# EAGLE board my_tic_tac_toe_board2 (EAGLE 6.5.0)
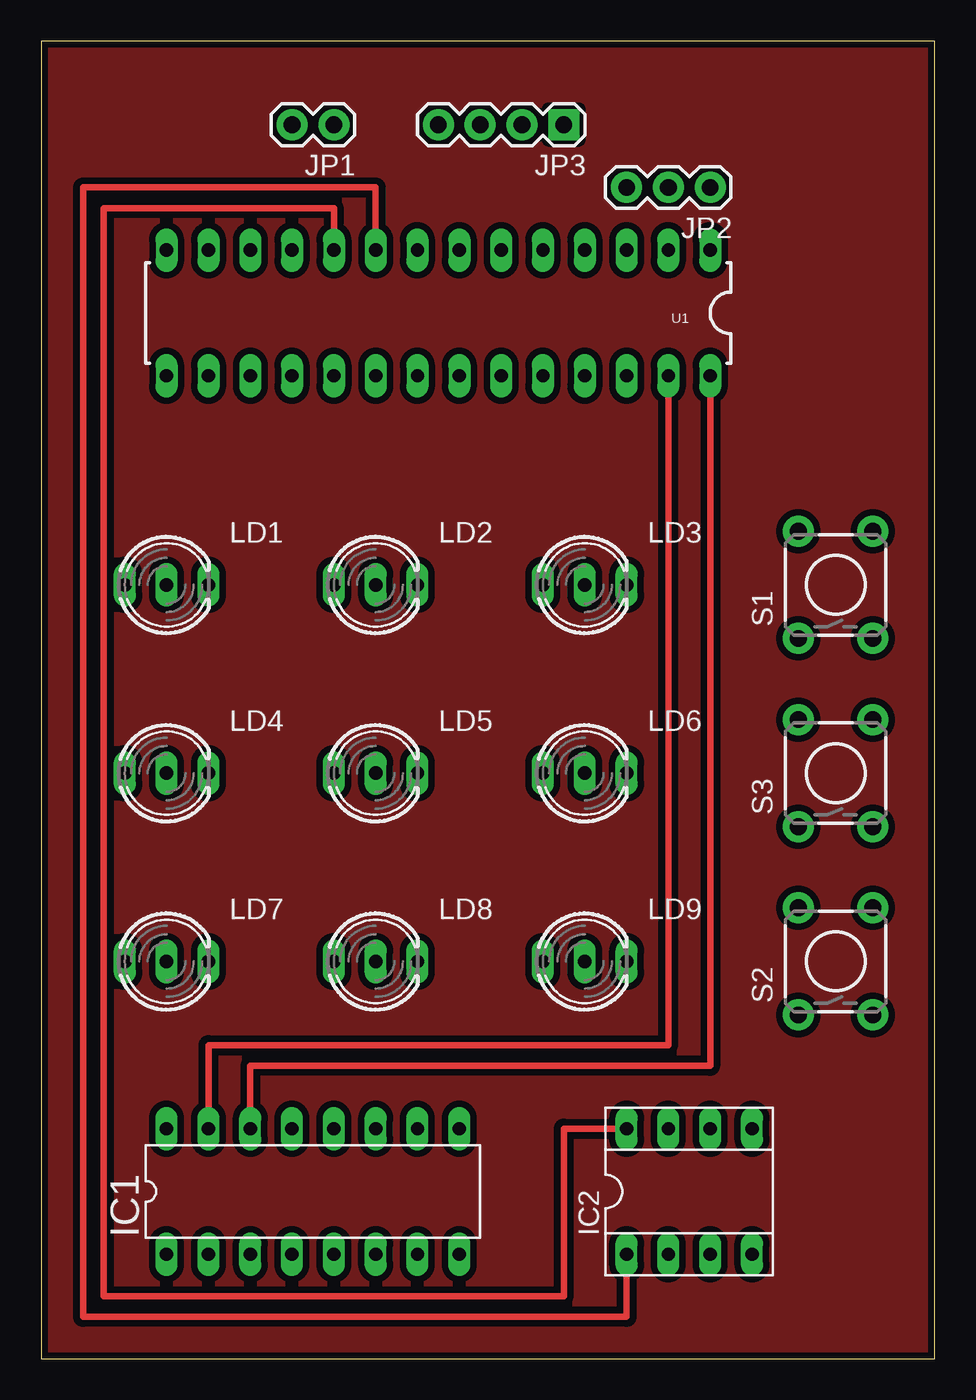
[diagram p0: board, top side]
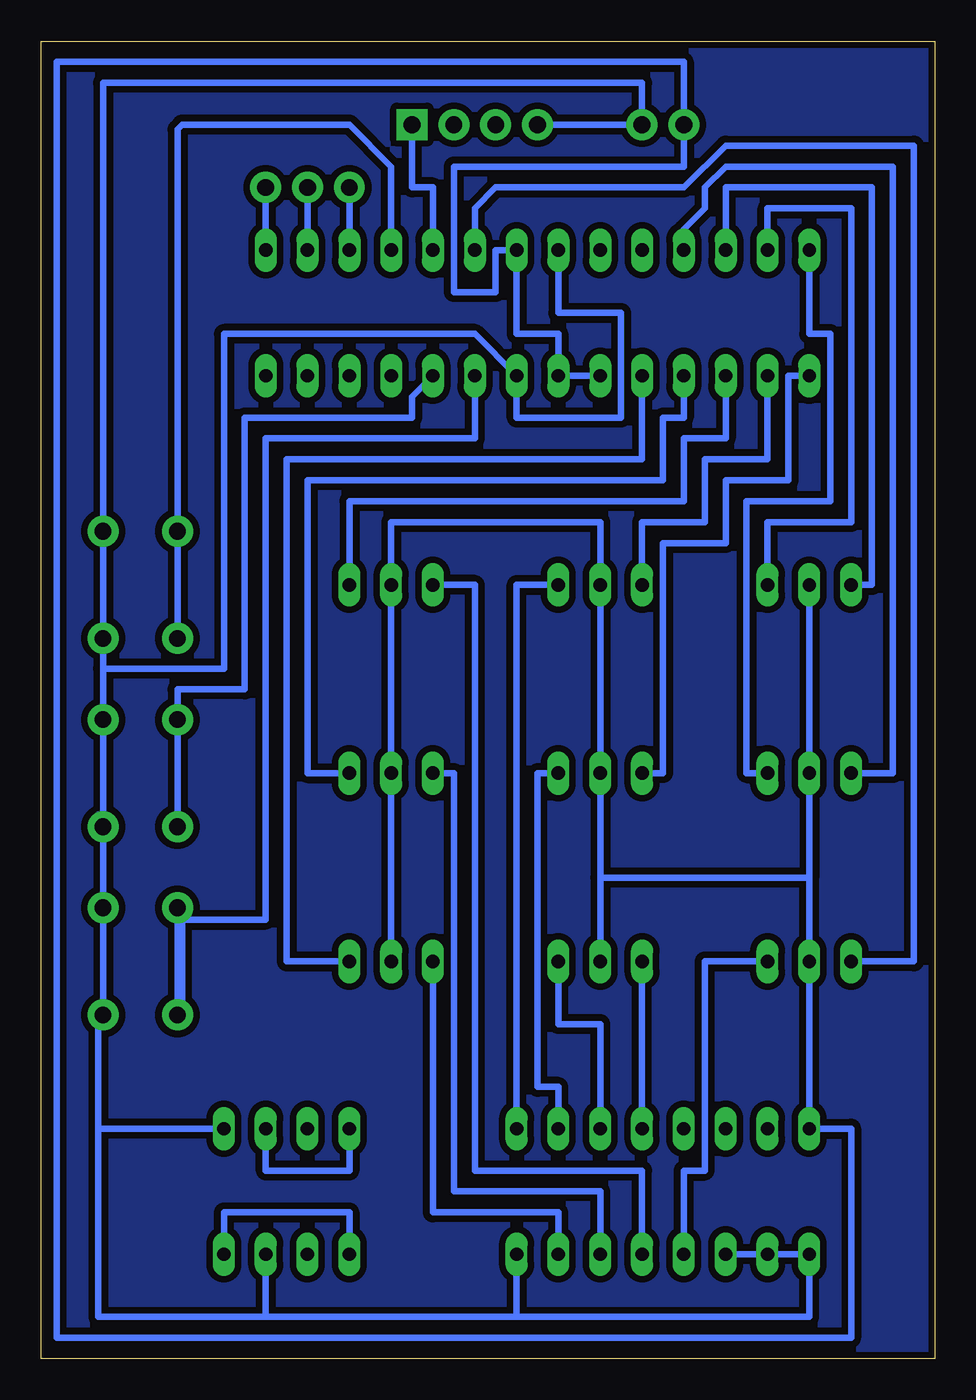
[diagram p1: board, bottom side, seen from below]

Size 54.28 x 80 mm. Coordinates in mm from the lower left corner, seen from the top.
Outline: 0,0 54.28,0 54.28,80 0,80 0,0
Copper layers (1*16): Top 0.035mm / dielectric 1.5mm / Bottom 0.035mm
Design rules "bastli": minimum track width 0.4mm, minimum drill 0.1mm, track to track 0.4mm, track to pad 0.4mm, pad to pad 0.4mm, via to via 0.4mm, smd to smd 0.4mm, copper to edge 0.4mm, drill to drill 0.4mm, minimum pad ring 10mil, minimum via ring 8mil, stop-mask expansion 4mil, vias tented up to drill 0mil, thermal gap 10mil

## Footprints (pad centres in the part's own frame; a part is rotated, then mirrored left to right if it is on the bottom)
DIL16 = drill 0.813 long: 1 -8.89,-3.81; 2 -6.35,-3.81; 3 -3.81,-3.81; 4 -1.27,-3.81; 5 1.27,-3.81; 6 3.81,-3.81; 7 6.35,-3.81; 8 8.89,-3.81; 9 8.89,3.81; 10 6.35,3.81; 11 3.81,3.81; 12 1.27,3.81; 13 -1.27,3.81; 14 -3.81,3.81; 15 -6.35,3.81; 16 -8.89,3.81
SOCKET-08 = drill 0.813 long: 1 -3.81,-3.81; 2 -1.27,-3.81; 3 1.27,-3.81; 4 3.81,-3.81; 5 3.81,3.81; 6 1.27,3.81; 7 -1.27,3.81; 8 -3.81,3.81
1X02 = drill 1.016 pad 1.88: 1 0,0; 2 2.54,0
1X03 = drill 1.016 pad 1.88: 1 0,0; 2 2.54,0; 3 5.08,0
1X04 = drill 1.016 pad 1.88 square: 1 0,0 | drill 1.016 pad 1.88: 2 2.54,0; 3 5.08,0; 4 7.62,0
DUOLED-C-5MM = drill 0.813 long: AR 2.54,0; AX -2.54,0; C 0,0
TACTILE-PTH = drill 1.016 pad 1.88: 1 -3.251,2.261; 2 3.251,2.261; 3 -3.251,-2.261; 4 3.251,-2.261
DIL28-3 = drill 0.813 long: 1 -16.51,-3.81; 2 -13.97,-3.81; 3 -11.43,-3.81; 4 -8.89,-3.81; 5 -6.35,-3.81; 6 -3.81,-3.81; 7 -1.27,-3.81; 8 1.27,-3.81; 9 3.81,-3.81; 10 6.35,-3.81; 11 8.89,-3.81; 12 11.43,-3.81; 13 13.97,-3.81; 14 16.51,-3.81; 15 16.51,3.81; 16 13.97,3.81; 17 11.43,3.81; 18 8.89,3.81; 19 6.35,3.81; 20 3.81,3.81; 21 1.27,3.81; 22 -1.27,3.81; 23 -3.81,3.81; 24 -6.35,3.81; 25 -8.89,3.81; 26 -11.43,3.81; 27 -13.97,3.81; 28 -16.51,3.81

## Placement (x,y rotation side)
IC1  PCF8574P  [DIL16]  16.51,10.16 0 top
IC2  [SOCKET-08]  39.37,10.16 0 top
JP1  M02PTH  [1X02]  17.78,74.93 180 top
JP2  [1X03]  40.64,71.12 180 top
JP3  [1X04]  31.75,74.93 180 top
LD1  [DUOLED-C-5MM]  7.62,46.99 0 top
LD2  [DUOLED-C-5MM]  20.32,46.99 0 top
LD3  [DUOLED-C-5MM]  33.02,46.99 0 top
LD4  [DUOLED-C-5MM]  7.62,35.56 0 top
LD5  [DUOLED-C-5MM]  20.32,35.56 0 top
LD6  [DUOLED-C-5MM]  33.02,35.56 0 top
LD7  [DUOLED-C-5MM]  7.62,24.13 0 top
LD8  [DUOLED-C-5MM]  20.32,24.13 0 top
LD9  [DUOLED-C-5MM]  33.02,24.13 0 top
S1  [TACTILE-PTH]  48.26,46.99 90 top
S2  [TACTILE-PTH]  48.26,24.13 90 top
S3  [TACTILE-PTH]  48.26,35.56 90 top
U1  ATMEGA328P_PDIP  [DIL28-3]  24.13,63.5 180 top

## Library data of the parts
IC1 = micro-philips; MPN: PCF8574PN; OC_FARNELL: 204020; OC_NEWARK: 11N8515
IC2 = ic-package
JP1-JP3 = SparkFun-Connectors
LD1-LD9 = led
S1-S3 = SparkFun-Electromechanical
U1 = SparkFun-DigitalIC

## Nets
N$1: IC1.16 JP1.2 LD1.C LD2.C LD3.C LD7.C LD8.C LD9.C U1.7 U1.20 U1.21
N$2: IC1.1 IC1.2 IC1.3 IC1.8 IC2.3 IC2.5 JP1.1 JP3.4 S1.3 S1.4 S2.3 S2.4 S3.3 S3.4 U1.8 U1.22
N$3: JP2.1 U1.1
N$4: JP2.2 U1.2
N$5: JP2.3 U1.3
N$6: IC1.15 U1.27
N$7: IC1.14 U1.28
N$8: S1.1 S1.2 U1.4
N$9: IC2.1 IC2.4 U1.9
N$10: S3.1 S3.2 U1.24
N$12: IC2.6 IC2.8 U1.10
N$13: S2.1 S2.2 U1.23
N$14: JP3.1 U1.5
S$2: LD4.AX U1.11
S$3: LD9.AR U1.19
S$4: LD6.AR U1.18
S$5: LD3.AR U1.17
S$6: IC1.7 LD9.AX
S$7: IC1.6 LD6.AX
S$8: IC1.5 LD3.AX
S$9: IC1.9 LD2.AR
S$10: IC1.10 LD5.AR
S$11: IC1.11 LD8.AR
S$12: IC1.12 LD8.AX
S$13: IC1.4 LD7.AR
S$14: LD2.AX U1.16
S$15: LD5.AX U1.15
S$16: LD4.AR U1.14
S$17: LD1.AR U1.13
S$18: LD1.AX U1.12
S$20: LD7.AX U1.6

## Tracks (layer width: path | path; a pad name or v marks a point on that pad's centre or on a via)
N$1
  Bottom 0.406: U1.20 U1.21 22.86,62.23 25.4,62.23 U1.7 26.67,67.31 26.67,64.77 29.21,64.77 29.21,72.39 15.24,72.39 JP1.2 15.24,78.74 53.34,78.74 53.34,1.27 5.08,1.27 5.08,13.97 IC1.16 LD7.C 7.62,29.21 | LD1.C 7.62,29.21 | 20.32,29.21 LD2.C 20.32,50.8 33.02,50.8 LD3.C LD9.C | 20.32,29.21 LD8.C | 7.62,29.21 20.32,29.21
N$2
  Bottom 0.406: IC2.5 50.8,13.97 | 50.8,13.97 50.8,2.54 40.64,2.54 | 40.64,2.54 25.4,2.54 | 25.4,2.54 7.62,2.54 IC1.1 IC1.2 IC1.3 | IC1.8 25.4,2.54 | IC2.3 40.64,2.54 | JP3.4 JP1.1 17.78,77.47 50.52,77.47 S1.4 S1.3 50.52,41.91 | 50.8,33.02 50.52,33.02 | 50.52,41.91 S3.4 50.52,33.02 | 50.52,33.02 S3.3 S2.4 S2.3 50.8,20.88 50.8,13.97 | U1.8 22.86,63.5 19.05,63.5 19.05,57.15 25.4,57.15 U1.22 27.94,62.23 43.18,62.23 43.18,41.91 50.52,41.91
N$3
  Bottom 0.406: JP2.1 U1.1
N$4
  Bottom 0.406: JP2.2 U1.2
N$5
  Bottom 0.406: JP2.3 U1.3
N$6
  Top 0.406: IC1.15 10.16,19.05 38.1,19.05 U1.27
N$7
  Top 0.406: U1.28 40.64,17.78 12.7,17.78 IC1.14
N$8
  Bottom 0.406: S1.1 S1.2 46,74.65 45.72,74.93 35.56,74.93 33.02,72.39 U1.4
N$9
  Top 0.406: IC2.1 35.56,2.54 2.54,2.54 2.54,71.12 20.32,71.12 U1.9
  Bottom 0.406: 43.18,7.62 IC2.4 43.18,8.89 35.56,8.89 IC2.1
N$10
  Bottom 0.406: U1.24 31.75,58.42 31.75,57.15 41.91,57.15 41.91,40.64 46,40.64 S3.2 S3.1
N$12
  Top 0.406: U1.10 17.78,69.85 3.81,69.85 3.81,3.81 31.75,3.81 31.75,13.97 IC2.8
  Bottom 0.406: IC2.8 35.56,11.43 40.64,11.43 IC2.6
N$13
  Bottom 0.406: S2.2 S2.1 45.72,20.88 45.72,26.67 40.64,26.67 40.64,55.88 27.94,55.88 U1.23
N$14
  Bottom 0.406: U1.5 30.48,71.12 31.75,71.12 JP3.1
S$2
  Bottom 0.406: U1.11 15.24,68.58 13.97,69.85 13.97,71.12 12.7,72.39 2.54,72.39 2.54,35.56 LD4.AX
S$3
  Bottom 0.406: U1.19 17.78,54.61 39.37,54.61 39.37,24.13 LD9.AR
S$4
  Bottom 0.406: U1.18 15.24,57.15 16.51,57.15 16.51,53.34 38.1,53.34 38.1,35.56 LD6.AR
S$5
  Bottom 0.406: U1.17 12.7,55.88 15.24,55.88 15.24,52.07 35.56,52.07 LD3.AR
S$6
  Bottom 0.406: IC1.7 22.86,8.89 30.48,8.89 LD9.AX
S$7
  Bottom 0.406: IC1.6 20.32,10.16 29.21,10.16 29.21,35.56 LD6.AX
S$8
  Bottom 0.406: IC1.5 17.78,11.43 27.94,11.43 27.94,46.99 LD3.AX
S$9
  Bottom 0.406: IC1.9 25.4,46.99 LD2.AR
S$10
  Bottom 0.406: IC1.10 22.86,16.51 24.13,16.51 24.13,35.56 LD5.AR
S$11
  Bottom 0.406: IC1.11 20.32,20.32 22.86,20.32 LD8.AR
S$12
  Bottom 0.406: IC1.12 LD8.AX
S$13
  Bottom 0.406: IC1.4 15.24,11.43 13.97,11.43 13.97,24.13 LD7.AR
S$14
  Bottom 0.406: U1.16 10.16,54.61 13.97,54.61 13.97,50.8 17.78,50.8 LD2.AX
S$15
  Bottom 0.406: U1.15 8.89,59.69 8.89,53.34 12.7,53.34 12.7,49.53 16.51,49.53 16.51,35.56 LD5.AX
S$16
  Bottom 0.406: U1.14 7.62,62.23 6.35,62.23 6.35,52.07 11.43,52.07 11.43,35.56 LD4.AR
S$17
  Bottom 0.406: U1.13 10.16,69.85 5.08,69.85 5.08,50.8 10.16,50.8 LD1.AR
S$18
  Bottom 0.406: U1.12 12.7,71.12 3.81,71.12 3.81,46.99 LD1.AX
S$19
  pour Bottom: 0,80.01 54.61,80.01 54.61,0 0,0
S$20
  Bottom 0.406: U1.6 27.94,69.85 26.67,71.12 15.24,71.12 12.7,73.66 1.27,73.66 1.27,24.13 LD7.AX
S$21
  pour Top: 0,80.01 54.61,80.01 54.61,0 0,0